# EAGLE board RoomIndicator.Inside.Multiple (EAGLE 6.4)
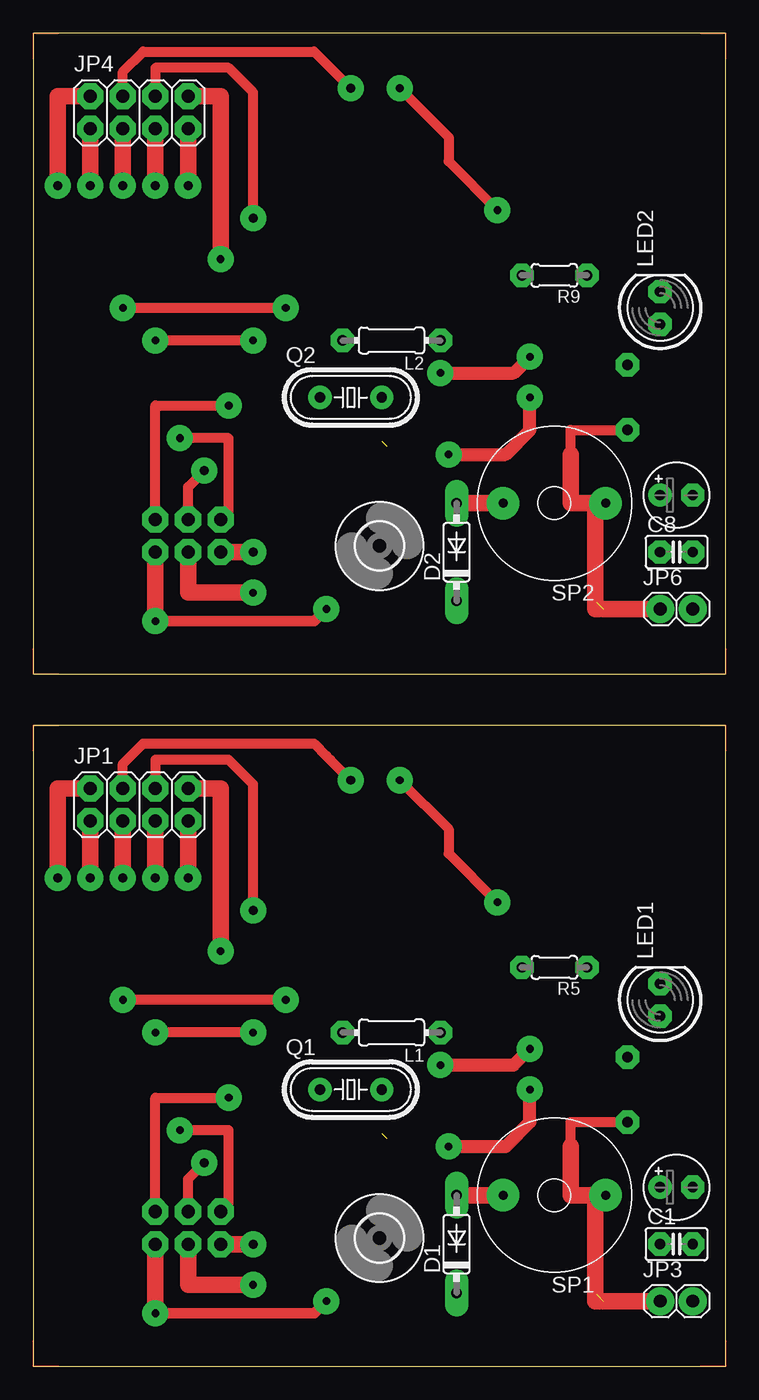
[diagram p0: board, top side]
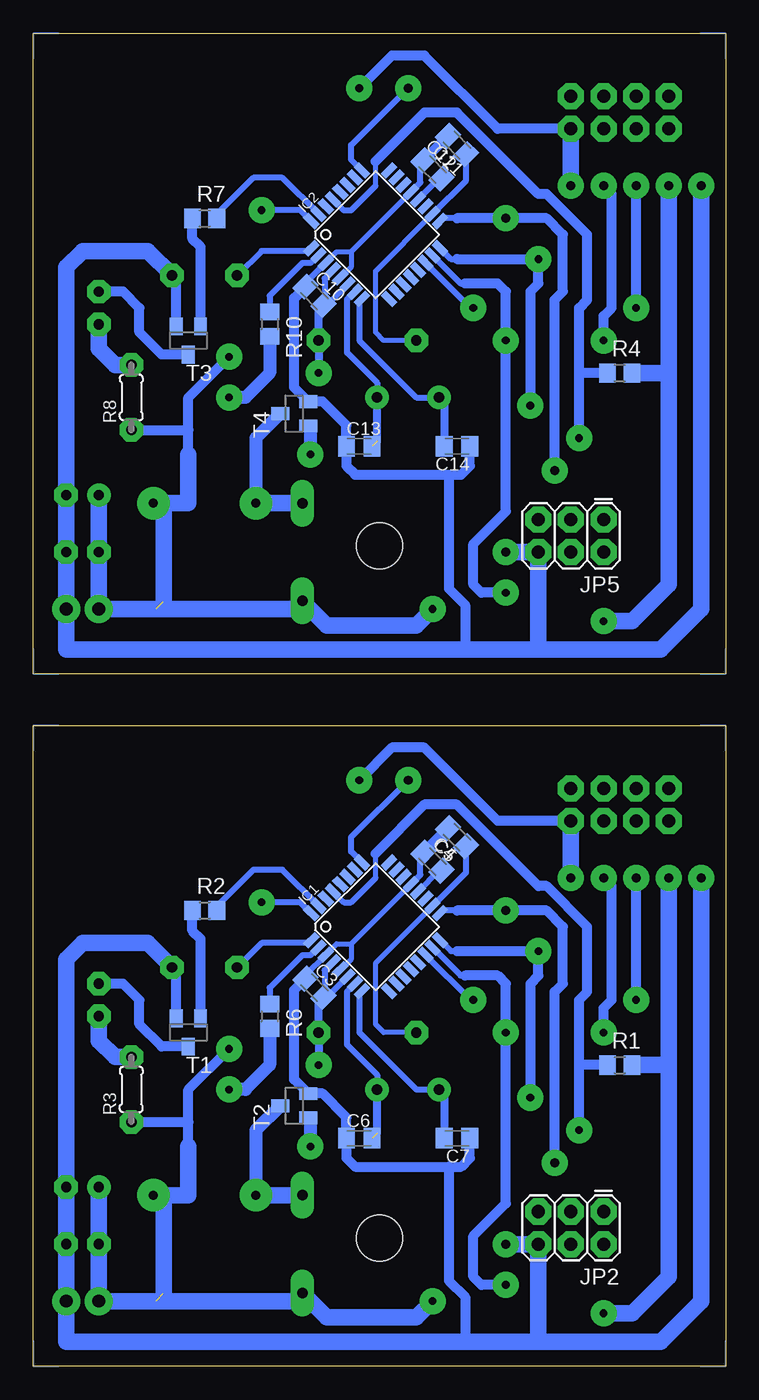
[diagram p1: board, bottom side, seen from below]

Size 54 x 104 mm. Coordinates in mm from the lower left corner, seen from the top.
Outline: 0,0 54,0 54,50 0,50 0,0
Outline: 0,54 54,54 54,104 0,104 0,54
Copper layers (1*16): Top 0.035mm / dielectric 1.5mm / Bottom 0.035mm
Design rules "default *": minimum track width 10mil, minimum drill 24mil, track to track 8mil, track to pad 8mil, pad to pad 8mil, via to via 8mil, smd to smd 8mil, copper to edge 40mil, drill to drill 8mil, minimum pad ring 20mil, minimum via ring 10mil, stop-mask expansion 4mil, vias tented up to drill 0mil, thermal gap 10mil

## Footprints (pad centres in the part's own frame; a part is rotated, then mirrored left to right if it is on the bottom)
C025-025X050 = drill 0.813 octagon: 1 -1.27,0; 2 1.27,0
E2,5-5 = drill 0.813 pad 1.6: + -1.27,0 | drill 0.813 pad 1.6 octagon: - 1.27,0
C0805K = smd 1.3 x 1.6: 1 -1,0; 2 1,0
DO35-7 = drill 0.813 long: A 3.81,0; C -3.81,0
TQFP32-08 = smd 1.27 x 0.559: 1 -4.293,2.8; 2 -4.293,2; 3 -4.293,1.2; 4 -4.293,0.4; 5 -4.293,-0.4; 6 -4.293,-1.2; 7 -4.293,-2; 8 -4.293,-2.8; 17 4.293,-2.8; 18 4.293,-2; 19 4.293,-1.2; 20 4.293,-0.4; 21 4.293,0.4; 22 4.293,1.2; 23 4.293,2; 24 4.293,2.8 | smd 0.559 x 1.27: 9 -2.8,-4.293; 10 -2,-4.293; 11 -1.2,-4.293; 12 -0.4,-4.293; 13 0.4,-4.293; 14 1.2,-4.293; 15 2,-4.293; 16 2.8,-4.293; 25 2.8,4.293; 26 2,4.293; 27 1.2,4.293; 28 0.4,4.293; 29 -0.4,4.293; 30 -1.2,4.293; 31 -2,4.293; 32 -2.8,4.293
2X04 = drill 1.016 octagon: 1 -3.81,-1.27; 2 -3.81,1.27; 3 -1.27,-1.27; 4 -1.27,1.27; 5 1.27,-1.27; 6 1.27,1.27; 7 3.81,-1.27; 8 3.81,1.27
2X3 = drill 1.016 pad 1.88 octagon: 1 0,0; 2 0,2.54; 3 2.54,0; 4 2.54,2.54; 5 5.08,0; 6 5.08,2.54
1X02 = drill 1 pad 2.184: 1 -1.27,0; 2 1.27,0
0204/7 = drill 0.813 octagon: 1 -3.81,0; 2 3.81,0
LED5MM = drill 0.813 octagon: A -1.27,0; K 1.27,0
HC49/S = drill 0.813: 1 -2.413,0; 2 2.413,0
R0805 = smd 1.3 x 1.5: 1 -0.95,0; 2 0.95,0
0204/5 = drill 0.813 octagon: 1 -2.54,0; 2 2.54,0
AL80P = drill 0.7 pad 2.54: 1 -4,0; 2 4,0
SOT23 = smd 1 x 1.4: 1 -0.95,-1.1; 2 0.95,-1.1; 3 0,1.1
3,6 = hole 3.6: 0,0

## Placement (x,y rotation side)
C1  100n  [C025-025X050]  50.16,9.53 0 top
C2  100uF  [E2,5-5]  50.16,13.97 0 top
C3  100n  [C0805K]  32.07,29.53 315 bottom
C4  100n  [C0805K]  22.86,39.37 315 bottom
C5  100n  [C0805K]  20.95,41.27 135 bottom
C6  27p  [C0805K]  28.57,17.78 0 bottom
C7  27p  [C0805K]  20.95,17.78 180 bottom
C8  100n  [C025-025X050]  50.16,63.52 0 top
C9  100uF  [E2,5-5]  50.16,67.97 0 top
C10  100n  [C0805K]  32.07,83.53 315 bottom
C11  100n  [C0805K]  22.86,93.37 315 bottom
C12  100n  [C0805K]  20.95,95.28 135 bottom
C13  27p  [C0805K]  28.57,71.78 0 bottom
C14  27p  [C0805K]  20.95,71.78 180 bottom
D1  1N4148  [DO35-7]  33.02,9.53 90 top
D2  1N4148  [DO35-7]  33.02,63.52 90 top
IC1  MEGA328P  [TQFP32-08]  27.3,34.29 45 bottom
IC2  MEGA328P  [TQFP32-08]  27.3,88.29 45 bottom
JP1  NRF24L01  [2X04]  8.26,43.81 0 top
JP2  SPI  [2X3]  9.53,12.06 180 bottom
JP3  BATT  [1X02]  50.16,5.08 0 top
JP4  NRF24L01  [2X04]  8.26,97.81 0 top
JP5  SPI  [2X3]  9.53,66.06 180 bottom
JP6  BATT  [1X02]  50.16,59.08 0 top
L1  10uH  [0204/7]  27.94,26.04 180 top
L2  10uH  [0204/7]  27.94,80.03 180 top
LED1  GREEN  [LED5MM]  48.9,28.57 90 top
LED2  GREEN  [LED5MM]  48.9,82.58 90 top
Q1  8MHz  [HC49/S]  24.77,21.59 0 top
Q2  8MHz  [HC49/S]  24.77,75.59 0 top
R1  10k  [R0805]  8.26,23.5 0 bottom
R2  10k  [R0805]  40.64,35.56 0 bottom
R3  30  [0204/5]  46.35,21.59 90 bottom
R4  10k  [R0805]  8.26,77.5 0 bottom
R5  5k-1M  [0204/5]  40.64,31.11 180 top
R6  10k  [R0805]  35.56,27.3 270 bottom
R7  10k  [R0805]  40.64,89.56 0 bottom
R8  30  [0204/5]  46.35,75.59 90 bottom
R9  5k-1M  [0204/5]  40.64,85.11 180 top
R10  10k  [R0805]  35.56,81.31 270 bottom
SP1  AL60PWIDE  [AL80P]  40.64,13.34 180 top
SP2  AL60PWIDE  [AL80P]  40.64,67.33 180 top
T1  BC847  [SOT23]  41.91,26.04 180 bottom
T2  BC847  [SOT23]  33.66,20.32 90 bottom
T3  BC847  [SOT23]  41.91,80.03 180 bottom
T4  BC847  [SOT23]  33.66,74.32 90 bottom
U$1  [3,6]  27,10 0 top
U$2  [3,6]  27,64 0 top

## Library data of the parts
C1-C14 L1 L2 R1-R10 = rcl
D1 D2 = diode
IC1 IC2 = atmel; MPN: ATMEGA8-16AU; OC_FARNELL: 9171371; OC_NEWARK: 73M8863
JP1 JP3 JP4 JP6 = pinhead
JP2 JP5 = SparkFun-Connectors
LED1 LED2 = led
Q1 Q2 = crystal; OC_FARNELL: 1667008; OC_NEWARK: unknown
SP1 SP2 = buzzer
T1-T4 = transistor
U$1 U$2 = holes

## Nets
+3V1: C8.1 C9.+ C10.2 D2.C IC2.4 IC2.6 JP4.1 JP5.2 JP6.1 L2.1 R4.2 R8.1 SP2.1
+3V3: C1.1 C2.+ C3.2 D1.C IC1.4 IC1.6 JP1.1 JP2.2 JP3.1 L1.1 R1.2 R3.1 SP1.1
AVCC: C5.1 IC1.18 L1.2
AVCC1: C12.1 IC2.18 L2.2
BUZZ: IC1.2 R6.1
BUZZ1: IC2.2 R10.1
CE: IC1.25 JP1.4
CE1: IC2.25 JP4.4
CSN: IC1.14 JP1.3
CSN1: IC2.14 JP4.3
GND: C1.2 C2.- C3.1 C4.1 C5.2 C6.1 C7.1 IC1.3 IC1.5 IC1.21 JP1.2 JP2.6 JP3.2 R5.1 T1.2 T2.2
GND1: C8.2 C9.- C10.1 C11.1 C12.2 C13.1 C14.1 IC2.3 IC2.5 IC2.21 JP4.2 JP5.6 JP6.2 R9.1 T3.2 T4.2
INT0: IC1.32 JP1.7
INT1: IC1.1 R5.2
INT2: IC2.1 R9.2
INT3: IC2.32 JP4.7
LED: IC1.31 R2.2
LED1: IC2.31 R7.2
MISO: IC1.16 JP1.8 JP2.1
MISO1: IC2.16 JP4.8 JP5.1
MOSI: IC1.15 JP1.5 JP2.4
MOSI1: IC2.15 JP4.5 JP5.4
N$4: C4.2 IC1.20
N$5: R6.2 T2.1
N$6: LED1.A R3.2
N$10: R2.1 T1.1
N$11: LED1.K T1.3
N$14: C11.2 IC2.20
N$15: R7.1 T3.1
N$16: D1.A SP1.2 T2.3
N$17: LED2.K T3.3
N$18: D2.A SP2.2 T4.3
N$19: R10.2 T4.1
N$20: LED2.A R8.2
RST: IC1.29 JP2.5 R1.1
RST1: IC2.29 JP5.5 R4.1
SCK: IC1.17 JP1.6 JP2.3
SCK1: IC2.17 JP4.6 JP5.3
TOSC1: C6.2 IC1.7 Q1.2
TOSC2: C7.2 IC1.8 Q1.1
TOSC3: C14.2 IC2.8 Q2.1
TOSC4: C13.2 IC2.7 Q2.2

## Tracks (layer width: path | path; a pad name or v marks a point on that pad's centre or on a via)
+3V1  (via drill 0.6 pad 2.03, 0.7 pad 2.03)  (1 unrouted)
  Top 0.762: 41.91,71.14 41.91,73.05 R8.1
  Top 0.813: v9.53,58.13 21.91,58.13 v22.86,59.08
  Top 1.016: v31.75,77.5 37.47,77.5 v38.73,78.77
  Top 1.27: JP4.1 v4.45,92.1 | v9.53,58.13 JP5.2 | JP6.1 44.45,59.08 | 44.13,59.08 43.81,59.08 43.81,67.33 41.91,67.33 41.91,71.14
  Bottom 0.457: IC2.6 30.76,83.14 C10.2 31.27,82.91 31.27,84.89 IC2.4
  Bottom 0.61: C10.2 31.75,82.43 L2.1 v31.75,77.5
  Bottom 0.762: 41.91,71.14 41.91,73.05 | R8.1 41.91,73.05 | 41.91,73.05 41.91,75.59 v38.73,78.77
  Bottom 1.27: JP6.1 C8.1 C9.+ | v4.45,92.1 4.45,77.5 | 41.91,71.14 41.91,67.97 | 41.91,67.97 41.91,67.41 | R4.2 4.45,77.5 | JP6.1 44.45,59.08 43.81,59.08 | 4.45,77.5 4.45,62.89 4.45,62.57 4.45,60.98 7.3,58.13 v9.53,58.13 | 43.81,59.08 42.86,59.08 | 42.86,59.08 42.55,59.08 | 42.55,59.08 33.66,59.08 D2.C 31.11,57.81 24.13,57.81 v22.86,59.08 | 41.91,67.97 41.91,67.33 SP2.1 43.81,67.33 43.81,59.08 | JP6.1 42.86,59.08 | 42.86,59.08 42.55,59.08
+3V3  (via drill 0.6 pad 2.03, 0.7 pad 2.03)  (1 unrouted)
  Top 0.762: 41.91,17.14 41.91,19.05 R3.1
  Top 0.813: v9.53,4.13 21.91,4.13 v22.86,5.08
  Top 1.016: v31.75,23.5 37.47,23.5 v38.73,24.77
  Top 1.27: JP1.1 v4.45,38.1 | v9.53,4.13 JP2.2 | JP3.1 44.45,5.08 | 44.13,5.08 43.81,5.08 43.81,13.34 41.91,13.34 41.91,17.14
  Bottom 0.457: IC1.6 30.76,29.14 C3.2 31.27,28.91 31.27,30.89 IC1.4
  Bottom 0.61: C3.2 31.75,28.43 L1.1 v31.75,23.5
  Bottom 0.762: 41.91,17.14 41.91,19.05 | R3.1 41.91,19.05 | 41.91,19.05 41.91,21.59 v38.73,24.77
  Bottom 1.27: JP3.1 C1.1 C2.+ | v4.45,38.1 4.45,23.5 | 41.91,17.14 41.91,13.97 | 41.91,13.97 41.91,13.41 | R1.2 4.45,23.5 | JP3.1 44.45,5.08 43.81,5.08 | 4.45,23.5 4.45,8.89 4.45,8.57 4.45,6.99 7.3,4.13 v9.53,4.13 | 43.81,5.08 42.86,5.08 | 42.86,5.08 42.55,5.08 | 42.55,5.08 33.66,5.08 D1.C 31.11,3.81 24.13,3.81 v22.86,5.08 | 41.91,13.97 41.91,13.34 SP1.1 43.81,13.34 43.81,5.08 | JP3.1 42.86,5.08 | 42.86,5.08 42.55,5.08
AVCC
  Bottom 0.406: L1.2 26.67,26.04 27.3,26.67 27.3,31.46 IC1.18
  Bottom 0.457: IC1.18 20.25,38.52 C5.1
AVCC1
  Bottom 0.406: L2.2 26.67,80.03 27.3,80.67 27.3,85.46 IC2.18
  Bottom 0.457: IC2.18 20.25,92.52 C12.1
BUZZ
  Bottom 0.457: IC1.2 31.78,32.67 32.38,32.07 33.02,32.07 35.56,29.53 R6.1
BUZZ1
  Bottom 0.457: IC2.2 31.78,86.67 32.38,86.07 33.02,86.07 35.56,83.53 R10.1
CE  (via drill 0.7 pad 2.03)
  Top 0.762: JP1.4 6.99,46.99 8.57,48.58 21.91,48.58 22.86,47.62 23.18,47.31 v24.77,45.72
  Bottom 0.457: IC1.25 29.21,40.16 29.21,41.27 v24.77,45.72
CE1  (via drill 0.7 pad 2.03)
  Top 0.762: JP4.4 6.99,100.99 8.57,102.58 21.91,102.58 22.86,101.62 23.18,101.31 v24.77,99.72
  Bottom 0.457: IC2.25 29.21,94.16 29.21,95.28 v24.77,99.72
CSN  (via drill 0.6 pad 2.03, 0.7 pad 2.03)
  Top 0.762: v19.68,28.57 v6.99,28.57
  Top 1.27: JP1.3 v6.99,38.1
  Bottom 0.457: IC1.14 19.89,28.57 v19.68,28.57
  Bottom 0.762: v6.99,28.57 v6.99,38.1
CSN1  (via drill 0.6 pad 2.03, 0.7 pad 2.03)
  Top 0.762: v19.68,82.58 v6.99,82.58
  Top 1.27: JP4.3 v6.99,92.1
  Bottom 0.457: IC2.14 19.89,82.58 v19.68,82.58
  Bottom 0.762: v6.99,82.58 v6.99,92.1
GND  (via drill 0.7 pad 2.03)
  Top 1.27: JP1.2 1.91,45.09 v1.91,38.1 | JP2.6 v17.14,9.53
  Bottom 0.406: 29.21,32.95 29.21,31.75 29.99,30.97 IC1.5 | IC1.21 29.21,32.95 | IC1.3 30.34,32.95 29.21,32.95
  Bottom 0.457: 32.74,30.55 C3.1 32.77,30.52 IC1.3 | IC1.21 23.81,38.35 23.81,39.83 C4.1
  Bottom 0.61: 33.09,30.41 C3.1
  Bottom 0.762: C3.1 33.66,29.35 33.66,22.37 T2.2 31.43,21.27 29.57,19.41 C6.1 29.57,16.24 28.89,15.56 21.59,15.56 | C5.2 C4.1 | 21.59,15.56 20.64,15.56 19.95,16.24 C7.1 | T1.2 42.86,30.8 R5.1 | 21.59,15.56 21.59,6.67 20.32,5.4 20.32,1.91
  Bottom 1.27: 14.61,1.91 20.32,1.91 51.44,1.91 JP3.2 C1.2 C2.- 51.44,31.75 50.16,33.02 45.09,33.02 R5.1 | 14.61,1.91 5.08,1.91 1.91,5.08 v1.91,38.1 | 14.61,1.91 JP2.6 v17.14,9.53
GND1  (via drill 0.7 pad 2.03)
  Top 1.27: JP4.2 1.91,99.08 v1.91,92.1 | JP5.6 v17.14,63.52
  Bottom 0.406: 29.21,86.95 29.21,85.75 29.99,84.97 IC2.5 | IC2.21 29.21,86.95 | IC2.3 30.34,86.95 29.21,86.95
  Bottom 0.457: 32.74,84.55 C10.1 32.77,84.52 IC2.3 | IC2.21 23.81,92.35 23.81,93.83 C11.1
  Bottom 0.61: 33.09,84.41 C10.1
  Bottom 0.762: C10.1 33.66,83.35 33.66,76.37 T4.2 31.43,75.27 29.57,73.42 C13.1 29.57,70.24 28.89,69.56 21.59,69.56 | C12.2 C11.1 | 21.59,69.56 20.64,69.56 19.95,70.24 C14.1 | T3.2 42.86,84.8 R9.1 | 21.59,69.56 21.59,60.67 20.32,59.4 20.32,55.91
  Bottom 1.27: 14.61,55.91 20.32,55.91 51.44,55.91 JP6.2 C8.2 C9.- 51.44,85.75 50.16,87.02 45.09,87.02 R9.1 | 14.61,55.91 5.08,55.91 1.91,59.08 v1.91,92.1 | 14.61,55.91 JP5.6 v17.14,63.52
INT0  (via drill 0.6 pad 2.03, 0.7 pad 2.03)
  Top 0.762: v28.57,45.72 32.38,41.91 32.38,40.01 v36.2,36.2
  Top 1.27: v12.06,38.1 JP1.7
  Bottom 0.457: IC1.32 33.17,36.2 v36.2,36.2
  Bottom 0.762: JP1.7 17.78,42.55 23.5,48.26 26.04,48.26 v28.57,45.72
  Bottom 1.27: v12.06,38.1 JP1.7
INT1
  Bottom 0.457: IC1.1 32.53,33.02 36.2,33.02 R5.2
INT2
  Bottom 0.457: IC2.1 32.53,87.02 36.2,87.02 R9.2
INT3  (via drill 0.6 pad 2.03, 0.7 pad 2.03)
  Top 0.762: v28.57,99.72 32.38,95.91 32.38,94 v36.2,90.19
  Top 1.27: v12.06,92.1 JP4.7
  Bottom 0.457: IC2.32 33.17,90.19 v36.2,90.19
  Bottom 0.762: JP4.7 17.78,96.55 23.5,102.26 26.04,102.26 v28.57,99.72
  Bottom 1.27: v12.06,92.1 JP4.7
LED
  Bottom 0.457: IC1.31 34.58,38.73 36.83,38.73 39.69,35.88 R2.2
LED1
  Bottom 0.457: IC2.31 34.58,92.73 36.83,92.73 39.69,89.88 R7.2
MISO  (via drill 0.6 pad 2.03)
  Top 0.762: JP2.1 9.53,20.95 v15.24,20.95
  Top 1.27: JP1.8 14.61,45.09 v14.61,32.38
  Bottom 0.457: IC1.16 21.44,32.38 20.95,32.38
  Bottom 0.762: 20.95,32.38 v14.61,32.38 14.61,30.48 15.24,29.84 v15.24,20.95
MISO1  (via drill 0.6 pad 2.03)
  Top 0.762: JP5.1 9.53,74.95 v15.24,74.95
  Top 1.27: JP4.8 14.61,99.08 v14.61,86.39
  Bottom 0.457: IC2.16 21.44,86.39 20.95,86.39
  Bottom 0.762: 20.95,86.39 v14.61,86.39 14.61,84.48 15.24,83.84 v15.24,74.95
MOSI  (via drill 0.6 pad 2.03, 0.7 pad 2.03)
  Top 0.762: v17.14,26.04 v9.53,26.04
  Top 1.27: JP1.5 v9.53,38.1 | JP2.4 12.06,6.35 v17.14,6.35
  Bottom 0.457: IC1.15 20.67,30.48 20.32,30.48
  Bottom 0.762: 20.32,30.48 17.78,30.48 17.14,29.84 v17.14,26.04 17.14,12.7 19.68,10.16 19.68,6.99 19.05,6.35 v17.14,6.35 | v9.53,26.04 9.53,27.94 8.89,28.57 8.89,37.47 v9.53,38.1
MOSI1  (via drill 0.6 pad 2.03, 0.7 pad 2.03)
  Top 0.762: v17.14,80.03 v9.53,80.03
  Top 1.27: JP4.5 v9.53,92.1 | JP5.4 12.06,60.35 v17.14,60.35
  Bottom 0.457: IC2.15 20.67,84.48 20.32,84.48
  Bottom 0.762: 20.32,84.48 17.78,84.48 17.14,83.84 v17.14,80.03 17.14,66.7 19.68,64.16 19.68,60.98 19.05,60.35 v17.14,60.35 | v9.53,80.03 9.53,81.94 8.89,82.58 8.89,91.47 v9.53,92.1
N$1
  Bottom 0.1: 0,48 0,50 2,50
N$2
  Bottom 0.1: 52,50 54,50 54,48
N$3
  Bottom 0.1: 52,0 54,0 54,2
N$4
  Bottom 0.457: IC1.20 22.37,38.66 C4.2
N$5  (via drill 0.6 pad 2.03)
  Top 1.016: v32.38,17.14 36.83,17.14 38.73,19.05 v38.73,21.59
  Bottom 1.016: T2.1 32.38,19.37 v32.38,17.14 | R6.2 35.56,23.5 37.47,21.59 v38.73,21.59
N$6
  Bottom 1.27: LED1.A 48.9,25.4 47.62,24.13 R3.2
N$7
  Bottom 0.1: 0,2 0,0 2,0
N$8
  Top 0.1: 0,2 0,0 2,0
N$9
  Top 0.1: 52,0 54,0 54,2
N$10
  Bottom 0.762: T1.1 40.96,33.34 41.59,33.97 R2.1
N$11
  Bottom 0.762: T1.3 43.98,24.93 45.72,26.67 45.72,28.57 46.99,29.84 LED1.K
N$12
  Top 0.1: 54,48 54,50 52,50
N$13
  Top 0.1: 0,48 0,50 2,50
N$14
  Bottom 0.457: IC2.20 22.37,92.66 C11.2
N$15
  Bottom 0.762: T3.1 40.96,87.34 41.59,87.97 R7.1
N$16
  Top 1.27: D1.A SP1.2
  Bottom 1.016: T2.3 36.64,18.43 SP1.2
  Bottom 1.27: 36.83,13.34 D1.A
N$17
  Bottom 0.762: T3.3 43.98,78.94 45.72,80.67 45.72,82.58 46.99,83.84 LED2.K
N$18
  Top 1.27: D2.A SP2.2
  Bottom 1.016: T4.3 36.64,72.44 SP2.2
  Bottom 1.27: 36.83,67.33 D2.A
N$19  (via drill 0.6 pad 2.03)
  Top 1.016: v32.38,71.14 36.83,71.14 38.73,73.05 v38.73,75.59
  Bottom 1.016: T4.1 32.38,73.37 v32.38,71.14 | R10.2 35.56,77.5 37.47,75.59 v38.73,75.59
N$20
  Bottom 1.27: LED2.A 48.9,79.4 47.62,78.13 R8.2
N$21
  Bottom 0.1: 0,102 0,104 2,104
N$22
  Bottom 0.1: 52,104 54,104 54,102
N$23
  Bottom 0.1: 52,54 54,54 54,56
N$24
  Bottom 0.1: 0,56 0,54 2,54
N$25
  Top 0.1: 0,56 0,54 2,54
N$26
  Top 0.1: 52,54 54,54 54,56
N$27
  Top 0.1: 54,102 54,104 52,104
N$28
  Top 0.1: 0,102 0,104 2,104
RST  (via drill 0.6 pad 2.03)
  Top 0.762: JP2.5 15.24,12.7 15.24,18.41 v11.43,18.41
  Bottom 0.406: 27.3,38.1 27.3,40.01
  Bottom 0.457: IC1.29 29.78,36.2 29.21,36.2 27.3,38.1
  Bottom 0.762: 27.3,40.01 23.5,43.81 20.95,43.81 14.61,37.47 13.97,37.47 10.79,34.29 10.79,29.21 11.43,28.57 11.43,23.5 | R1.1 11.43,23.5 | v11.43,18.41 11.43,23.5
RST1  (via drill 0.6 pad 2.03)
  Top 0.762: JP5.5 15.24,66.7 15.24,72.42 v11.43,72.42
  Bottom 0.406: 27.3,92.1 27.3,94
  Bottom 0.457: IC2.29 29.78,90.19 29.21,90.19 27.3,92.1
  Bottom 0.762: 27.3,94 23.5,97.81 20.95,97.81 14.61,91.47 13.97,91.47 10.79,88.29 10.79,83.21 11.43,82.58 11.43,77.5 | R4.1 11.43,77.5 | v11.43,72.42 11.43,77.5
SCK  (via drill 0.7 pad 2.03)
  Top 0.762: v17.14,35.56 17.14,45.4 15.24,47.31 9.53,47.31 JP1.6 | JP2.3 12.06,14.61 v13.34,15.88
  Bottom 0.457: 20.95,35.56 22.07,35.56 IC1.17
  Bottom 0.762: 20.95,35.56 v17.14,35.56 13.97,35.56 12.7,34.29 12.7,29.84 13.34,29.21 v13.34,15.88
SCK1  (via drill 0.7 pad 2.03)
  Top 0.762: v17.14,89.56 17.14,99.4 15.24,101.31 9.53,101.31 JP4.6 | JP5.3 12.06,68.61 v13.34,69.88
  Bottom 0.457: 20.95,89.56 22.07,89.56 IC2.17
  Bottom 0.762: 20.95,89.56 v17.14,89.56 13.97,89.56 12.7,88.29 12.7,83.84 13.34,83.21 v13.34,69.88
TOSC1  (1 unrouted)
  Bottom 0.457: Q1.2 27.18,22.73 29.53,25.08 29.53,29.24 IC1.7
  Bottom 0.61: 27.18,18.18 Q1.2
TOSC2
  Bottom 0.457: IC1.8 28.57,29.06 28.57,26.04 24.13,21.59 Q1.1
  Bottom 0.61: Q1.1 21.95,21.19 C7.2
TOSC3
  Bottom 0.457: IC2.8 28.57,83.06 28.57,80.03 24.13,75.59 Q2.1
  Bottom 0.61: Q2.1 21.95,75.19 C14.2
TOSC4  (1 unrouted)
  Bottom 0.457: Q2.2 27.18,76.73 29.53,79.08 29.53,83.24 IC2.7
  Bottom 0.61: 27.18,72.18 Q2.2